# Altium PCB DC_Measure.PcbDoc
Units mil, origin at the board's own origin, x right, y up, seen from the top; angles counter-clockwise.
Board outline 4448.82 x 2165.35 mil, 2 copper layers (Top Layer, Bottom Layer); 54 components, 44 nets, 356 pads, 396 vias.
Unrouted connection lines stored in the file: 3.
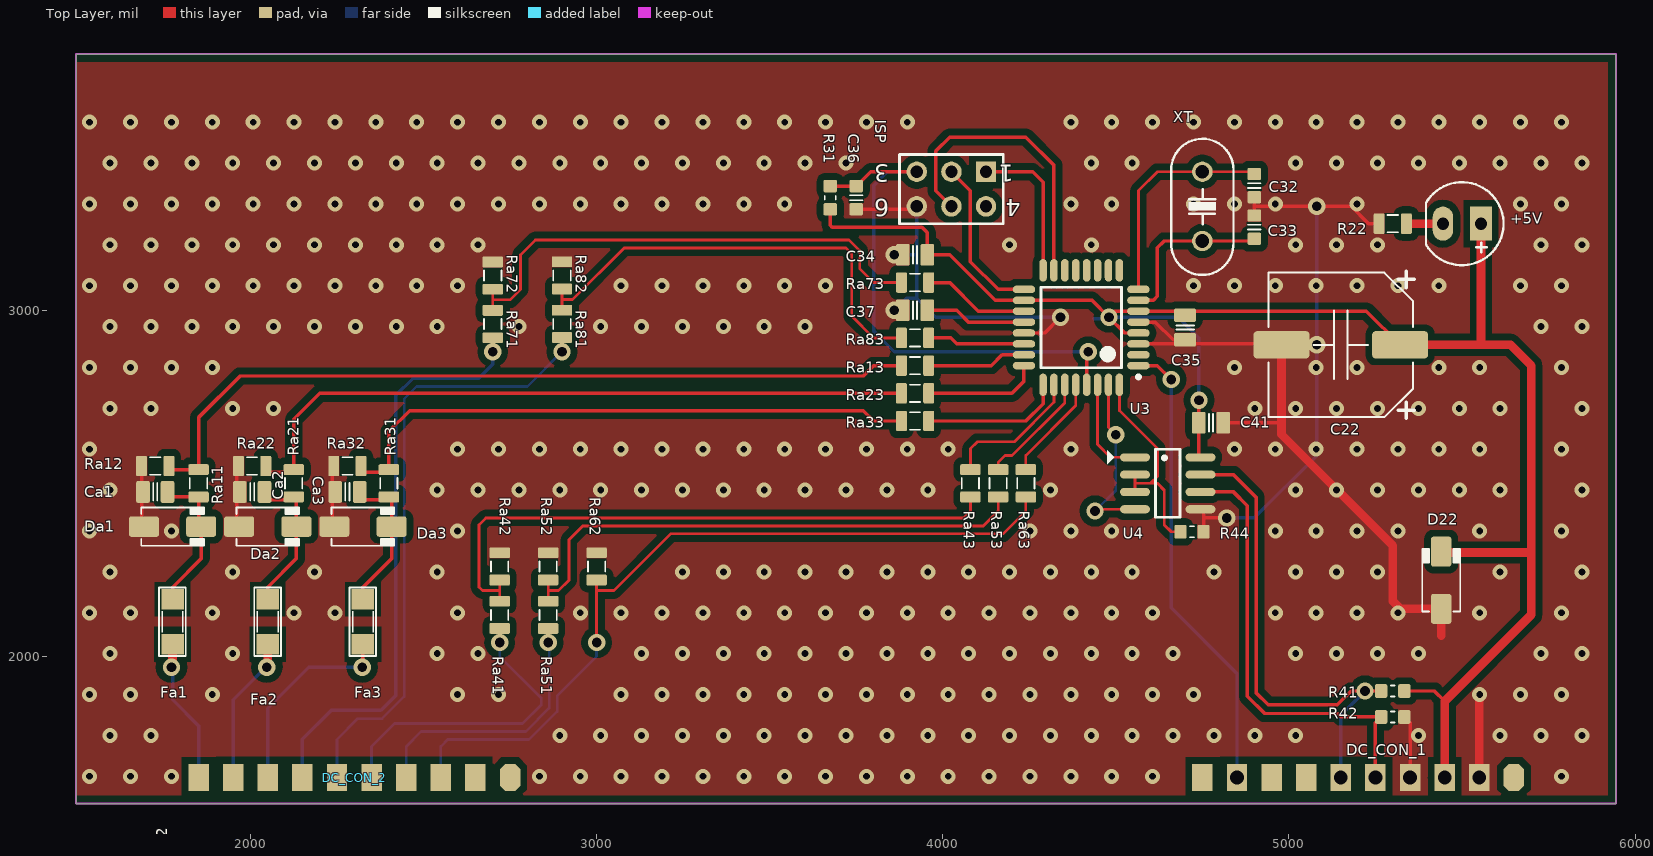
[diagram p0: Top Layer view]
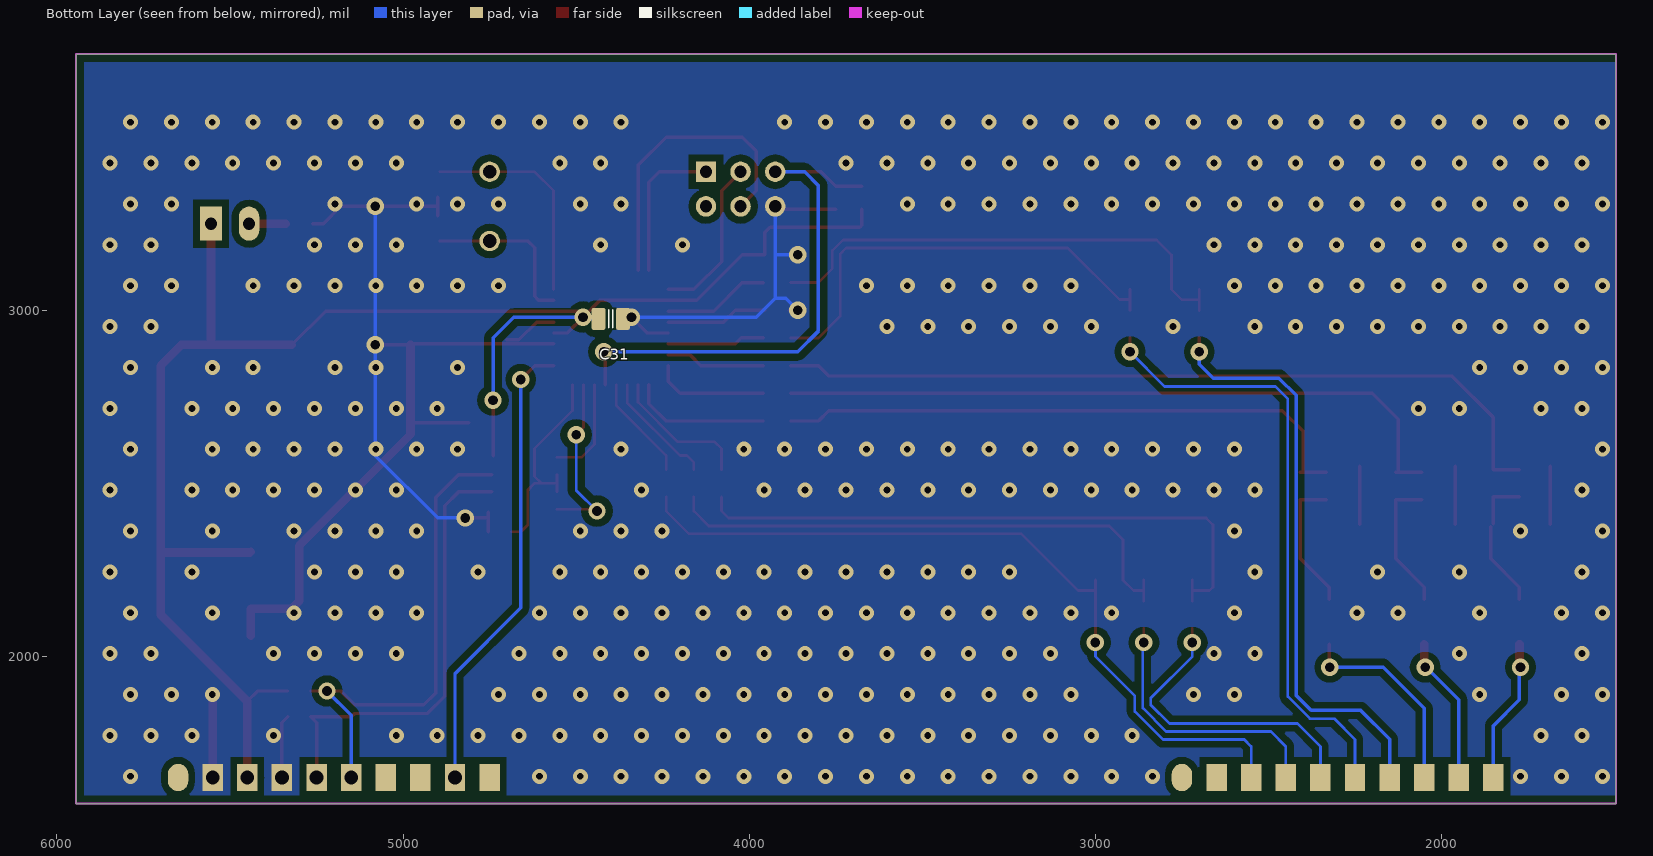
[diagram p1: Bottom Layer view, seen from below]
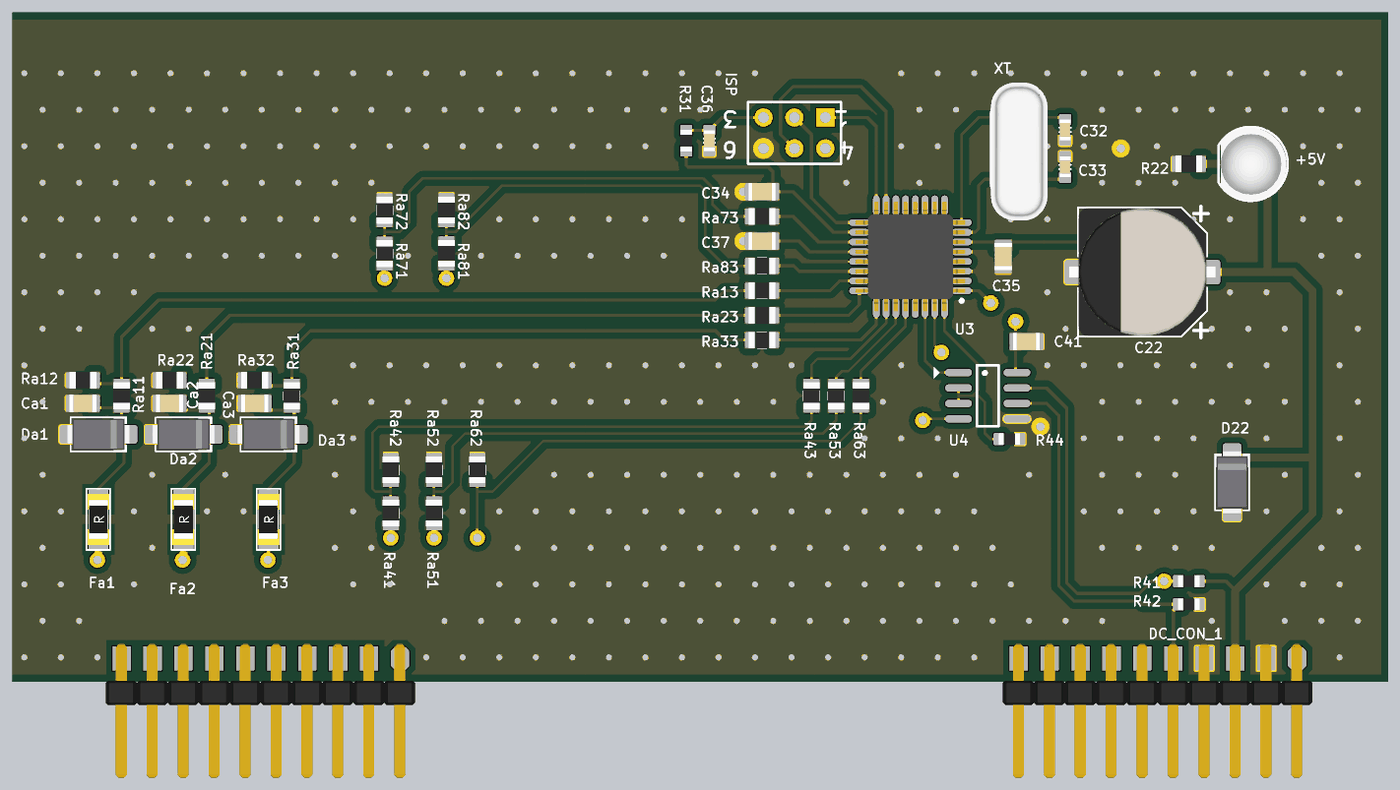
[diagram p2: 3D render of the assembled board from above, using the file's embedded part models]

## Layer stack, top to bottom
Top Solder: solder mask 0.4, Solder Resist, Dk 3.5
Top Layer: signal copper 1.4
Dielectric 1: dielectric 12.6, FR-4, Dk 4.8
Bottom Layer: signal copper 1.4
Bottom Solder: solder mask 0.4, Solder Resist, Dk 3.5

## Board outline
1496.06,1574.8 5944.88,1574.8 5944.88,3740.16 1496.06,3740.16

## Design rules (kind name [scope] priority, off if disabled: settings)
Clearance [All] p1: gap=10 except(8: Arc-SMDPad Track-SMDPad SMDPad-SMDPad; 20: Arc-Poly Track-Poly SMDPad-Poly THPad-Poly Via-Poly Fill-Poly Poly-Poly)
PlaneConnect [All] p1: planeconnectstyle=Direct reliefexpansion=20 reliefentries=4 reliefconductorwidth=10 reliefairgap=10
PolygonConnect [All] p1: connectstyle=Direct reliefconductorwidth=10 reliefentries=4 polygonreliefangle="90 Angle" airgapwidth=10
RoutingVias [All] p1: holewidth=28 width=50 viastyle="Through Hole" minholewidth=28 minwidth=50 maxholewidth=196.85 maxwidth=196.85
SolderMaskExpansion [All] p1: expansion=4
Width [All] p1: maxlimit=50 minlimit=8 preferedwidth=25
29 further rules are at their usual default settings.

## Components (designator, comment, footprint, x,y, rotation, side; value= is the part's Value field where it differs from the comment)
+5V "Led" "LED 5mm RED" 5500,3250 r180 top
C22 "2200uF/35V" CAP_ELEC_SIZE_G 5150,2900 r90 top
C31 "Cap" CAPC2012N_F#1 4400,2975 r180 bottom
C32 "CAP NP" CAPC1608N 4900,3360 r270 top
C33 "CAP NP" CAPC1608N 4900,3240 r90 top
C34 "Cap" CAPC2012N_F#2 3920,3160 r180 top
C35 "Cap" CAPC2012N_F#2 4700,2950 r270 top
C36 "CAP NP" CAPC1608N 3750,3325 r90 top
C37 "Cap" CAPC2012N_F#2 3920,3000 r180 top
C41 "100nF/104" CAPC2012N_F#2 4775,2675 r180 top
Ca1 "CAP NP" CAPC2012N_F#2 1725,2475 r0 top
Ca2 "CAP NP" CAPC2012N_F#2 2005,2475 r0 top
Ca3 "CAP NP" CAPC2012N_F#2 2280,2475 r0 top
D22 "Diode" DO-214AC 5440,2220 r90 top
Da1 "Diode" DO-214AC 1775,2375 r0 top
Da2 "Diode" DO-214AC 2050,2375 r0 top
Da3 "Diode" DO-214AC 2325,2375 r0 top
DC_CON_1 "Header 10X2A" OMC10 5650,1650 r180 top
DC_CON_2 "Header 10X2A" OMC10 2750,1650 r180 top
Fa1 "1.5A" "SMD 1206" 1775,2100 r90 top
Fa2 "1.5A" "SMD 1206" 2050,2100 r90 top
Fa3 "1.5A" "SMD 1206" 2325,2100 r90 top
ISP "Header 3X2A" HDR2X3_CEN 4125,3400 r180 top
R22 "Res_0805_1k" RESC2012N_F 5300,3250 r180 top
R31 "Res" RESC1608N_ZERO 3675,3325 r270 top
R41 "1k" RESC1608N_ZERO 5300,1900 r0 top
R42 "1k" RESC1608N_ZERO 5300,1825 r180 top
R44 "330R" RESC1608N_ZERO 4720,2360 r180 top
Ra11 "Res" RESC2012N_F 1850,2500 r90 top
Ra12 "Res" RESC2012N_F 1725,2550 r0 top
Ra13 "Res" RESC2012N_F 3920,2840 r180 top
Ra21 "Res" RESC2012N_F 2125,2500 r270 top
Ra22 "Res" RESC2012N_F 2005,2550 r180 top
Ra23 "Res" RESC2012N_F 3920,2760 r0 top
Ra31 "Res" RESC2012N_F 2400,2500 r90 top
Ra32 "Res" RESC2012N_F 2280,2550 r0 top
Ra33 "Res" RESC2012N_F 3920,2680 r180 top
Ra41 "Res" RESC2012N_F 2720,2120 r90 top
Ra42 "Res" RESC2012N_F 2720,2260 r270 top
Ra43 "Res" RESC2012N_F 4080,2500 r270 top
Ra51 "Res" RESC2012N_F 2860,2120 r270 top
Ra52 "Res" RESC2012N_F 2860,2260 r90 top
Ra53 "Res" RESC2012N_F 4160,2500 r90 top
Ra62 "Res" RESC2012N_F 3000,2260 r270 top
Ra63 "Res" RESC2012N_F 4240,2500 r270 top
Ra71 "Res" RESC2012N_F 2700,2960 r270 top
Ra72 "Res" RESC2012N_F 2700,3100 r90 top
Ra73 "Res" RESC2012N_F 3920,3080 r0 top
Ra81 "Res" RESC2012N_F 2900,2960.63 r270 top
Ra82 "Res" RESC2012N_F 2900,3100.63 r90 top
Ra83 "Res" RESC2012N_F 3920,2920 r0 top
U3 "ATmega88PA" 32PIN 4400,2950 r180 top
U4 "MAX485" SO-8 4650,2500 r0 top
XT "20MHz" XT2 4750,3300 r90 top

## Footprints (in the part's own frame and the unit in brackets; to place one, negate y for a bottom-side part, rotate by r counter-clockwise, add the part's x,y. Pads: shape width x height; smd on the part's side, far side on the other; paste and mask are expansions set on the pad)
32PIN [mm]
  oval 1.65x0.55 smd: 1(-4.2,2.8) 2(-4.2,2) 3(-4.2,1.2) 4(-4.2,0.4) 5(-4.2,-0.4) 6(-4.2,-1.2) 7(-4.2,-2) 8(-4.2,-2.8) 17(4.2,-2.8) 18(4.2,-2) 19(4.2,-1.2) 20(4.2,-0.4) 21(4.2,0.4) 22(4.2,1.2) 23(4.2,2) 24(4.2,2.8)
  oval 0.55x1.65 smd: 9(-2.8,-4.2) 10(-2,-4.2) 11(-1.2,-4.2) 12(-0.4,-4.2) 13(0.4,-4.2) 14(1.2,-4.2) 15(2,-4.2) 16(2.8,-4.2) 25(2.8,4.2) 26(2,4.2) 27(1.2,4.2) 28(0.4,4.2) 29(-0.4,4.2) 30(-1.2,4.2) 31(-2,4.2) 32(-2.8,4.2)
  silkscreen extent -4.33,-2.95 2.95,3.75, body extent -4.5,-4.5 4.5,4.5, height 1.6
CAP_ELEC_SIZE_G [mm] "Capacitor, polarized, aluminum can; 10.0x10.2mm DxH"
  round 0.635 on Mech14: 0(0,0)
  rrect25% 2x4.1 smd: 1(0,-4.35) 2(0,4.35)
  silkscreen extent -5.4,-5.4 5.4,5.3, body extent -5.25,-6 5.25,6, height 10.5
CAPC1608N [mm] "Chip Capacitor, Body 1.6x0.8mm, 0603, IPC Medium Density"
  round 0.254 on Mech14: 0(0,0)
  rrect25% 0.9x1 smd: 1(-0.85,0) 2(0.85,0)
  Top Layer pour cut-out: -0.4,0.6 0.4,0.6 0.4,-0.6 -0.4,-0.6
  silkscreen extent -0.18,-0.48 0.18,0.48, body extent -0.85,-0.45 0.85,0.45, height 0.89
CAPC2012N_F#1 [mm] "Chip Capacitor, Body 2.0x1.2mm, 0805, IPC Medium Density, for Flex circuits"
  round 0.254 on Mech14: 0(0,0)
  rrect25% 1.2x1.4 on Bottom Solder: 1(-0.9,0) 1(0.9,0)
  rrect25% 1x1.6 smd paste-1: 1(-0.9,0) 2(0.9,0)
  rrect25% 1x1.4 on Bottom Paste: 1(-0.9,0) 1(0.9,0)
  Top Layer pour cut-out: -0.4,0.8 0.4,0.8 0.4,-0.8 -0.4,-0.8
  silkscreen extent -0.15,-0.65 0.15,0.65, body extent -1.1,-0.72 1.1,0.73, height 1.34
CAPC2012N_F#2 [mm] "Chip Capacitor, Body 2.0x1.2mm, 0805, IPC Medium Density, for Flex circuits"
  round 0.254 on Mech14: 0(0,0)
  rrect25% 1.2x1.4 on Top Solder: 1(-0.9,0) 1(0.9,0)
  rrect25% 1x1.6 smd paste-1: 1(-0.9,0) 2(0.9,0)
  rrect25% 1x1.4 on Top Paste: 1(-0.9,0) 1(0.9,0)
  Top Layer pour cut-out: -0.4,0.8 0.4,0.8 0.4,-0.8 -0.4,-0.8
  silkscreen extent -0.15,-0.65 0.15,0.65, body extent -1.1,-0.72 1.1,0.73, height 1.34
DO-214AC [mm] "JEDEC DO214 variation AC. SMA"
  round 0.508 on Mech14: 0(0,0)
  rrect25% 2.2x1.5 smd: A(-2.1,0) K(2.1,0)
  silkscreen extent -2.3,-1.4 2.3,1.4, body extent -2.6,-1.3 2.6,1.3, height 2.42
HDR2X3_CEN [mm] "Connector; Header; 3x2 Position"
  rect 1.5x1.5 hole 0.9: 1(0,0)
  round 1.5 hole 0.9: 2(2.54,0) 3(5.08,0) 4(0,2.54) 5(2.54,2.54) 6(5.08,2.54)
  silkscreen extent -1.27,-1.27 6.35,3.81
"LED 5mm RED" [mm]
  rect 1.6x2.5 hole 0.9: A(-1.397,0)
  oval 1.5x2.5 hole 0.9: K(1.397,0)
  silkscreen extent -3.04,-3.05 2.64,3.04, body extent -2.94,-2.97 2.48,3.05, height 12.31
OMC10 [mm]
  oct 1.5x2 smd: 1(0,0)
  rect 1.5x2 smd: 2(2.54,0) 3(5.08,0) 4(7.62,0) 5(10.16,0) 6(12.7,0) 7(15.24,0) 8(17.78,0) 9(20.32,0) 10(22.86,0)
  oval 1.5x2 smd far side: 11(0,0)
  rect 1.5x2 smd far side: 12(2.54,0) 13(5.08,0) 14(7.62,0) 15(10.16,0) 16(12.7,0) 17(15.24,0) 18(17.78,0) 19(20.32,0) 20(22.86,0)
  body extent -1.24,-1.18 24.16,9.82, height 2.33
RESC1608N_ZERO [mm] "Chip Resistor, Body 1.6x0.8mm, 0603, IPC Medium Density"
  round 0.254 on Mech14: 0(0,0)
  rrect25% 0.9x1 smd: 1(-0.85,0) 2(0.85,0)
  Top Layer pour cut-out: -0.4,0.6 0.4,0.6 0.4,-0.6 -0.4,-0.6
  silkscreen extent -0.15,-0.41 0.15,0.41, body extent -0.87,-0.47 0.88,0.48, height 0.54
RESC2012N_F [mm] "Chip Resistor, Body 2.0x1.2mm, 0805, IPC Medium Density"
  round 0.254 on Mech14: 0(0,0)
  rrect25% 1x1.3 on Top Solder: 1(-1,0) 1(1,0)
  rrect25% 0.8x1.5 smd paste-1: 1(-1,0) 2(1,0)
  rrect25% 0.8x1.3 on Top Paste: 1(-1,0) 1(1,0)
  Top Layer pour cut-out: -0.6,0.75 0.6,0.75 0.6,-0.75 -0.6,-0.75
  silkscreen extent -0.38,-0.64 0.38,0.64, body extent -1.1,-0.67 1.1,0.68, height 0.69
"SMD 1206" [mil]
  rect 60x65 smd: 1(-65,0) 2(65,0)
  silkscreen extent -99,-38 99,39, body extent -83,-35 83,36, height 25
SO-8 [mm] "8-Pin Small Outline Integrated Circuit 1.27 mm Pitch, IPC Medium Density"
  oval 2.2x0.6 smd: 1(-2.4,1.905) 2(-2.4,0.635) 3(-2.4,-0.635) 4(-2.4,-1.905) 5(2.4,-1.905) 6(2.4,-0.635) 7(2.4,0.635) 8(2.4,1.905)
  silkscreen extent -4.44,-2.5 0.9,2.5, body extent -1.95,-2.45 1.95,2.45, height 1.75
XT2 [mm]
  round 1.5 hole 1: 1(-2.54,0) 2(2.54,0)
  silkscreen extent -5.03,-2.29 4.96,2.29, body extent -5.93,-2.36 5.42,2.29, height 3.5

## Part data
C22: library part CP4, "Cap 1000uF/16V - 220uF/50V"
C41: library part "CAP NP"
DC_CON_1 DC_CON_2: "Header, 10-Pin, Dual row"
Fa1 Fa2 Fa3: library part Fuse
ISP: "Header, 3-Pin, Dual row"
R22: library part Res
R41 R42 R44: library part Res, "Tro dan"
U3: library part ATmega48/168/328, "ATmega48/168/328"
U4: "RS232 - RS485 (Same sn75176)"
XT: library part Crystal

## Via types
v1: diameter 43.31, hole 19.68, Top Layer to Bottom Layer, tented both sides, 369 vias
v2: diameter 50, hole 28, Top Layer to Bottom Layer, 21 vias
v3: diameter 59.06, hole 39.37, Top Layer to Bottom Layer, 6 vias

## Nets (pads, with @x,y where several pads share a name; then routed paths per layer and width w, separated by ;. In a path a pad name is that pad's centre, name@x,y a point inside that pad or via, vN(x,y) a via of type N, cw(c..) or ccw(c..) an arc to the next point about the centre after c; other vN are vias at no path point)
+3V3: DC_CON_1.7 DC_CON_1.17
+5V_IN: +5V.A C22.1 C31.1@4435.43,2975 C34.1@3955.43,3160 C35.1@4700,2985.43 C41.2 D22.K DC_CON_1.3 DC_CON_1.13 ISP.4 R31.2 R41.2 U3.4 U3.6 U3.18 U4.8 | length 5091.7
  Top Layer w10: R31.2 3675,3245 3680,3240 3940,3240 3955.43,3224.57 3955.43,3160 4020,3160 4151.26,3028.74 U3.18 4431.26,3028.74 v2(4480,2980) 4525.75,2934.25 U3.4 ; v2@4497.24,2997.24 U3.6 5224.02,2997.24 C22.1 ; U4.8@4739.57,2579.92 C41.2 4739.57,2739.57 v2(4740,2740) ; R41.2 5420,1900 5450,1870
  Top Layer w25: C22.1 5640,2900 5700,2840 5700,2300 ; D22.K 5442.68,2300 5700,2300 ; v3(5450,1650) 5450,1870 5700,2120 5700,2300 ; 5555,2905 +5V.A
  Bottom Layer w10: C31.1@4435.43,2975 4495,2975 v2@4500,2980 ; v2(4480,2980) v2@4500,2980 ; v2(4740,2740) 4740,2920 4680,2980 v2@4500,2980
+12V_IN: DC_CON_1.1 DC_CON_1.11
ADC0: Ra13.1@3959.37,2840 U3.23 | length 288.2
  Top Layer w10: Ra13.1@3959.37,2840 4140,2840 4171.26,2871.26 U3.23
ADC1: Ra23.2 U3.24 | length 334.7
  Top Layer w10: Ra23.2 4200,2760 4234.65,2794.65 U3.24
ADC2: Ra33.1@3959.37,2680 U3.25 | length 405.9
  Top Layer w10: Ra33.1@3959.37,2680 4240,2680 4289.76,2729.76 U3.25
ADC3: Ra43.1@4080,2539.37 U3.26 | length 407.8
  Top Layer w8: Ra43.1@4080,2539.37 4080,2600 4100,2620 4206.87,2620 4321.26,2734.39 U3.26
ADC4: Ra53.2 U3.27 | length 336.8
  Top Layer w8: Ra53.2 4160,2560 4180,2580 4200,2580 4352.76,2732.76 U3.27
ADC5: Ra63.1@4240,2539.37 U3.28 | length 305
  Top Layer w8: Ra63.1@4240,2539.37 4240,2580 4384.25,2724.25 U3.28
ADC6: Ra73.2 U3.19 | length 309.6
  Top Layer w10: Ra73.2 4020,3080 4102.76,2997.24 U3.19
ADC7: Ra83.2 U3.22 | length 282.4
  Top Layer w10: Ra83.2 4022.76,2920 4040,2902.76 U3.22
AREF: C37.1@3955.43,3000 U3.20 | length 293.4
  Top Layer w10: C37.1@3955.43,3000 4040,3000 4074.25,2965.75 U3.20
DC0: DC_CON_2.20 Fa1.1 | length 417.5
  Top Layer w25: v2(1771.65,1968.5) 1775,1971.85 Fa1.1
  Bottom Layer w10: v2@1775,1968.5 1775,1875 1850,1800 DC_CON_2.20
DC1: DC_CON_2.19 Fa2.1 | length 427.5
  Top Layer w25: v2(2047.24,1968.5) 2050,1971.26 Fa2.1
  Bottom Layer w10: DC_CON_2.19 1950,1875 v2@2045.37,1970.37
DC2: DC_CON_2.18 Fa3.1 | length 589.3
  Top Layer w10: v2(2322.83,1968.5) 2325,1970.67 Fa3.1
  Bottom Layer w10: DC_CON_2.18 2050,1850 2168.5,1968.5 v2(2322.83,1968.5)
DC3: DC_CON_2.17 Ra71.2 | length 1693.6
  Top Layer w10: v2(2700,2880) Ra71.2
  Bottom Layer w10: DC_CON_2.17 2150,1760 2234,1844 2377.13,1844 2420,1886.87 2420,2753.94 2470.06,2804 2660,2804 2700,2844 v2(2700,2880)
DC4: DC_CON_2.16 Ra81.2 | length 1769
  Top Layer w8: v2(2900,2880) Ra81.2
  Bottom Layer w8: DC_CON_2.16 2250,1760 2310,1820 2380,1820 2444,1884 2444,2744 2480,2780 2800,2780 v2(2900,2880)
DC5: DC_CON_2.15 Ra41.1@2720,2080.63 | length 900
  Top Layer w8: v2(2720,2040) Ra41.1@2720,2080.63
  Bottom Layer w8: DC_CON_2.15 2350,1740 2416,1806 2786,1806 2840,1860 2840,1880 2720,2000 v2(2720,2040)
DC6: DC_CON_2.14 Ra51.2 | length 780.2
  Top Layer w8: v2(2860,2040) Ra51.2
  Bottom Layer w8: DC_CON_2.14 2450,1740 2493,1783 2795.53,1783 2863,1850.47 2863,2037 v2(2860,2040)
GND: C22.2 C31.2 C32.2 C33.2 C34.2 C35.2 C36.1 C37.2 C41.1@4810.43,2675 Ca1.1@1689.57,2475 Ca2.1@1969.57,2475 Ca3.1@2244.57,2475 D22.A Da1.A Da2.A Da3.A DC_CON_1.2 DC_CON_1.4 DC_CON_1.12 DC_CON_1.14 ISP.6 R22.2 R42.1 R44.1 Ra12.1@1685.63,2550 Ra22.2 Ra32.1@2240.63,2550 Ra42.1@2720,2299.37 Ra52.2 Ra62.1@3000,2299.37 Ra72.2 Ra82.2 U3.3 U3.5 U3.21 U4.5 | length 5635.5
  Top Layer w10: Da1.A@1685.63,2381.69 Ra12.1@1685.63,2550 ; Da2.A@1960.63,2381.69 Ra22.2@1960.63,2550 ; Da3.A@2235.63,2381.69 Ra32.1@2235.63,2550 ; C36.1 ISP.6@3916.54,3291.54 ; v2(3860,3000) C37.2 ; U3.21 4294.25,2934.25 v2(4340,2980) ; U3.3 4975.98,2902.76 C22.2 v2(5080,2900) ; U3.5 4614.25,2965.75 4665.43,2914.57 C35.2 ; R44.1 4753.46,2400 ; U4.5@4753.46,2416.02 4753.46,2400 ; C41.1@4810.43,2675 4973.74,2675 ; v2(4820,2400) 4753.46,2400 ; C33.2 4900,3300 ; C32.2 4900,3300 ; R22.2 5230,3250 5180,3300 v2(5080,3300) 4900,3300 ; R42.1 5350,1808.46 v3(5350,1650)
  Top Layer w25: C22.2 4978.74,2641.26 5300,2320 5300,2160 5322.68,2137.32 D22.A 5440,2060 ; v3(5550,1650) v1@5550,1889.76
  Bottom Layer w10: v2(3860,3000) 3895,3035 3925,3035 ; v2(3860,3160) 3925,3160 ; ISP.6 3925,3160 ; v2(4340,2980) 3980,2980 3925,3035 ; v2(4820,2400) 4900,2400 5080,2580 v2(5080,2900) v2(5080,3300) ; 3925,3035 3925,3160
  other v1: 1535.43,1653.54 1653.54,1653.54 1771.65,1653.54 2834.64,1653.54 2952.76,1653.54 3070.87,1653.54 3188.98,1653.54 3307.09,1653.54 3425.2,1653.54 3543.31,1653.54 3661.42,1653.54 3779.53,1653.54 3897.64,1653.54 4015.75,1653.54 4133.86,1653.54 4251.97,1653.54 4370.08,1653.54 4488.19,1653.54 4606.3,1653.54 5787.4,1653.54 1594.49,1771.65 1712.6,1771.65 2893.7,1771.65 3011.81,1771.65 3129.92,1771.65 3248.03,1771.65 3366.14,1771.65 3484.25,1771.65 3602.36,1771.65 3720.47,1771.65 3838.58,1771.65 3956.69,1771.65 4074.8,1771.65 4192.91,1771.65 4311.02,1771.65 4429.13,1771.65 4547.24,1771.65 4665.35,1771.65 4783.46,1771.65 4901.57,1771.65 5019.68,1771.65 5374.01,1771.65 5610.23,1771.65 5728.34,1771.65 5846.45,1771.65 1535.43,1889.76 1653.54,1889.76 1889.76,1889.76 2598.42,1889.76 2716.53,1889.76 3070.87,1889.76 3188.98,1889.76 3307.09,1889.76 3425.2,1889.76 3543.31,1889.76 3661.42,1889.76 3779.53,1889.76 3897.64,1889.76 4015.75,1889.76 4133.86,1889.76 4251.97,1889.76 4370.08,1889.76 4488.19,1889.76 4606.3,1889.76 4724.41,1889.76 5551.18,1889.76 5669.29,1889.76 5787.4,1889.76 1594.49,2007.87 1948.82,2007.87 2539.37,2007.87 2657.48,2007.87 3129.92,2007.87 3248.03,2007.87 3366.14,2007.87 3484.25,2007.87 3602.36,2007.87 3720.47,2007.87 3838.58,2007.87 3956.69,2007.87 4074.8,2007.87 4192.91,2007.87 4311.02,2007.87 4429.13,2007.87 4547.24,2007.87 4665.35,2007.87 5019.68,2007.87 5137.79,2007.87 5255.9,2007.87 5374.01,2007.87 5728.34,2007.87 5846.45,2007.87 1535.43,2125.98 1653.54,2125.98 1889.76,2125.98 2125.98,2125.98 2244.09,2125.98 2598.42,2125.98 2952.76,2125.98 3070.87,2125.98 3188.98,2125.98 3307.09,2125.98 3425.2,2125.98 3543.31,2125.98 3661.42,2125.98 3779.53,2125.98 3897.64,2125.98 4015.75,2125.98 4133.86,2125.98 4251.97,2125.98 4370.08,2125.98 4488.19,2125.98 4606.3,2125.98 4960.63,2125.98 5078.74,2125.98 5196.85,2125.98 5314.96,2125.98 5551.18,2125.98 5787.4,2125.98 1594.49,2244.09 1948.82,2244.09 2185.04,2244.09 2539.37,2244.09 3248.03,2244.09 3366.14,2244.09 3484.25,2244.09 3602.36,2244.09 3720.47,2244.09 3838.58,2244.09 3956.69,2244.09 4074.8,2244.09 4192.91,2244.09 4311.02,2244.09 4429.13,2244.09 4547.24,2244.09 4783.46,2244.09 5019.68,2244.09 5137.79,2244.09 5255.9,2244.09 5610.23,2244.09 5846.45,2244.09 1535.43,2362.2 1771.65,2362.2 2598.42,2362.2 4251.97,2362.2 4370.08,2362.2 4488.19,2362.2 4960.63,2362.2 5078.74,2362.2 5196.85,2362.2 5314.96,2362.2 5551.18,2362.2 5787.4,2362.2 1594.49,2480.31 2539.37,2480.31 2657.48,2480.31 2775.59,2480.31 2893.7,2480.31 3011.81,2480.31 3129.92,2480.31 3248.03,2480.31 3366.14,2480.31 3484.25,2480.31 3602.36,2480.31 3720.47,2480.31 3838.58,2480.31 3956.69,2480.31 4311.02,2480.31 5019.68,2480.31 5137.79,2480.31 5255.9,2480.31 5374.01,2480.31 5492.12,2480.31 5610.23,2480.31 5846.45,2480.31 1535.43,2598.42 2598.42,2598.42 2716.53,2598.42 2834.64,2598.42 2952.76,2598.42 3070.87,2598.42 3188.98,2598.42 3307.09,2598.42 3425.2,2598.42 3543.31,2598.42 3661.42,2598.42 3779.53,2598.42 3897.64,2598.42 4015.75,2598.42 4370.08,2598.42 4842.52,2598.42 4960.63,2598.42 5078.74,2598.42 5196.85,2598.42 5314.96,2598.42 5433.07,2598.42 5551.18,2598.42 5787.4,2598.42 1594.49,2716.53 1712.6,2716.53 1948.82,2716.53 2066.93,2716.53 4901.57,2716.53 5019.68,2716.53 5137.79,2716.53 5255.9,2716.53 5374.01,2716.53 5492.12,2716.53 5610.23,2716.53 5846.45,2716.53 1535.43,2834.64 1653.54,2834.64 1771.65,2834.64 1889.76,2834.64 4842.52,2834.64 5078.74,2834.64 5196.85,2834.64 5433.07,2834.64 5551.18,2834.64 5787.4,2834.64 1594.49,2952.76 1712.6,2952.76 1830.71,2952.76 1948.82,2952.76 2066.93,2952.76 2185.04,2952.76 2303.15,2952.76 2421.26,2952.76 2539.37,2952.76 2775.59,2952.76 3011.81,2952.76 3129.92,2952.76 3248.03,2952.76 3366.14,2952.76 3484.25,2952.76 3602.36,2952.76 5728.34,2952.76 5846.45,2952.76 1535.43,3070.87 1653.54,3070.87 1771.65,3070.87 1889.76,3070.87 2007.87,3070.87 2125.98,3070.87 2244.09,3070.87 2362.2,3070.87 2480.31,3070.87 2598.42,3070.87 3070.87,3070.87 3188.98,3070.87 3307.09,3070.87 3425.2,3070.87 3543.31,3070.87 3661.42,3070.87 4724.41,3070.87 4842.52,3070.87 4960.63,3070.87 5078.74,3070.87 5196.85,3070.87 5314.96,3070.87 5433.07,3070.87 5669.29,3070.87 5787.4,3070.87 1594.49,3188.98 1712.6,3188.98 1830.71,3188.98 1948.82,3188.98 2066.93,3188.98 2185.04,3188.98 2303.15,3188.98 2421.26,3188.98 2539.37,3188.98 2657.48,3188.98 4192.91,3188.98 4429.13,3188.98 5019.68,3188.98 5137.79,3188.98 5255.9,3188.98 5728.34,3188.98 5846.45,3188.98 1535.43,3307.09 1653.54,3307.09 1771.65,3307.09 1889.76,3307.09 2007.87,3307.09 2125.98,3307.09 2244.09,3307.09 2362.2,3307.09 2480.31,3307.09 2598.42,3307.09 2716.53,3307.09 2834.64,3307.09 2952.76,3307.09 3070.87,3307.09 3188.98,3307.09 3307.09,3307.09 3425.2,3307.09 3543.31,3307.09 4370.08,3307.09 4488.19,3307.09 4724.41,3307.09 4842.52,3307.09 4960.63,3307.09 5196.85,3307.09 5669.29,3307.09 5787.4,3307.09 1594.49,3425.2 1712.6,3425.2 1830.71,3425.2 1948.82,3425.2 2066.93,3425.2 2185.04,3425.2 2303.15,3425.2 2421.26,3425.2 2539.37,3425.2 2657.48,3425.2 2775.59,3425.2 2893.7,3425.2 3011.81,3425.2 3129.92,3425.2 3248.03,3425.2 3366.14,3425.2 3484.25,3425.2 3602.36,3425.2 3720.47,3425.2 4429.13,3425.2 4547.24,3425.2 5019.68,3425.2 5137.79,3425.2 5255.9,3425.2 5374.01,3425.2 5492.12,3425.2 5610.23,3425.2 5728.34,3425.2 5846.45,3425.2 1535.43,3543.31 1653.54,3543.31 1771.65,3543.31 1889.76,3543.31 2007.87,3543.31 2125.98,3543.31 2244.09,3543.31 2362.2,3543.31 2480.31,3543.31 2598.42,3543.31 2716.53,3543.31 2834.64,3543.31 2952.76,3543.31 3070.87,3543.31 3188.98,3543.31 3307.09,3543.31 3425.2,3543.31 3543.31,3543.31 3661.42,3543.31 3779.53,3543.31 3897.64,3543.31 4370.08,3543.31 4488.19,3543.31 4606.3,3543.31 4724.41,3543.31 4842.52,3543.31 4960.63,3543.31 5078.74,3543.31 5196.85,3543.31 5314.96,3543.31 5433.07,3543.31 5551.18,3543.31 5669.29,3543.31 5787.4,3543.31
IDC: DC_CON_1.9 DC_CON_1.19 U3.1 | length 1339.8
  Top Layer w10: U3.1 4620.24,2839.76 v2(4660,2800)
  Bottom Layer w10: v2(4660,2800) 4660,2140 4850,1950 v3(4850,1650)
MCU_RX: U3.30 U4.1 | length 295.8
  Top Layer w8: U3.30 4447.24,2612.76 4485,2575 U4.1
MCU_TX: U3.31 U4.4 | length 515.9
  Top Layer w8: v2(4440,2420) 4445,2425 U4.4 ; U3.31 4478.74,2661.26 v2(4500,2640)
  Bottom Layer w8: v2(4440,2420) 4500,2480 v2(4500,2640)
MISO: ISP.1 U3.16 | length 432
  Top Layer w10: ISP.1 4260,3400 4289.76,3370.24 U3.16
MOSI: ISP.5 U3.15 | length 873.5
  Top Layer w10: ISP.5 3980,3345 3980,3460 4020,3500 4240,3500 4321.26,3418.74 U3.15
Net+5V_2: +5V.K R22.1@5339.37,3250 | length 105.6
  Top Layer w25: R22.1@5339.37,3250 +5V.K
NetCa1_2: Ca1.2 Da1.K Fa1.2 Ra11.1@1850,2460.63 | length 397.4
  Top Layer w10: Ca1.2@1774.8,2460.63 1850,2460.63 Da1.K@1850,2382.68 ; Fa1.2 1775,2200 1857.68,2282.68 Da1.K
NetCa2_2: Ca2.2 Da2.K Fa2.2 Ra21.2 | length 397.4
  Top Layer w10: Fa2.2 2050,2200 2132.68,2282.68 Da2.K 2132.68,2452.95 Ca2.2@2057.48,2452.95
NetCa3_2: Ca3.2 Da3.K Fa3.2 Ra31.1@2400,2460.63 | length 397.4
  Top Layer w10: Fa3.2 2325,2200 2407.68,2282.68 Da3.K 2407.68,2452.95 Ca3.2@2332.48,2452.95
NetRa11_2: Ra11.2 Ra12.2 Ra13.2 | length 2318.4
  Top Layer w10: Ra12.2@1775,2539.37 Ra11.2 1850,2690 1970,2810 3770,2810 3800,2840 Ra13.2
NetRa21_1: Ra21.1@2125,2539.37 Ra22.1@2044.37,2550 Ra23.1@3880.63,2760 | length 2007.3
  Top Layer w10: Ra22.1@2057.68,2531.69 Ra21.1@2132.68,2531.69 ; Ra21.1@2125,2539.37 2125,2685 2200,2760 Ra23.1@3880.63,2760
NetRa31_2: Ra31.2 Ra32.2 Ra33.2 | length 1703.5
  Top Layer w10: Ra32.2@2332.68,2531.69 Ra31.2@2407.68,2531.69 ; Ra31.2 2400,2650 2460,2710 3770,2710 3800,2680 Ra33.2
NetRa41_2: Ra41.2 Ra42.2 Ra43.2 | length 1782.6
  Top Layer w8: Ra41.2 2720,2190 ; Ra42.2 2720,2190 ; Ra43.2 4080,2420 4060,2400 2680,2400 2660,2380 2660,2200 2670,2190 2720,2190
NetRa51_1: Ra51.1@2860,2159.37 Ra52.1@2860,2220.63 Ra53.1@4160,2460.63 | length 1565.7
  Top Layer w8: Ra51.1@2860,2159.37 2860,2190 ; Ra52.1@2860,2220.63 2860,2190 ; Ra53.1@4160,2460.63 4160,2420 4117,2377 2960,2377 2920,2337 2920,2220 2890,2190 2860,2190
NetRa71_1: Ra71.1@2700,2999.37 Ra72.1@2700,3060.63 Ra73.1@3880.63,3080 | length 1453.8
  Top Layer w8: Ra71.1@2700,2999.37 2700,3030 ; Ra72.1@2700,3060.63 2700,3030 ; Ra73.1@3880.63,3080 3800,3080 3760,3120 3760,3172.53 3729.53,3203 2823,3203 2780,3160 2780,3060 2750,3030 2700,3030
NetRa81_1: Ra81.1@2900,3000 Ra82.1@2900,3061.26 Ra83.1@3880.63,2920 | length 1316.9
  Top Layer w8: Ra81.1@2900,3000 2900,3030.63 ; Ra82.1@2900,3061.26 2900,3030.63 ; Ra83.1@3880.63,2920 3800,2920 3737,2983 3737,3163 3720,3180 3080,3180 2930.63,3030.63 2900,3030.63
RS485A: DC_CON_1.5 DC_CON_1.15 R42.2 U4.6 | length 1295.5
  Top Layer w10: U4.6 4840,2475 4880,2435 4880,1884.64 4929.64,1835 5140,1835 5150,1825 R42.2 5250,1808.46 v3(5250,1650)
RS485B: DC_CON_1.6 DC_CON_1.16 R41.1 U4.7 | length 1424
  Top Layer w10: U4.7 4840,2525 4905,2460 4905,1895 4940,1860 5140,1860 5180,1900 v2(5220,1900) R41.1
  Bottom Layer w10: v3(5150,1650) 5150,1830 v2(5220,1900)
RS485D: R44.2 U3.32 U4.2 U4.3 | length 636
  Top Layer w8: U3.32 4510.24,2709.76 4620,2600 4620,2520 4600,2500 ; U4.3 4555.51,2500 ; U4.2 4555.51,2500 ; R44.2 4660,2360 4640,2380 4640,2480 4620,2500 4600,2500 ; 4555.51,2500 4600,2500
RST: C36.2 ISP.3 R31.1 U3.29 | length 1570.7
  Top Layer w10: R31.1 C36.2 3791.54,3400 ISP.3 ; U3.29 4415.75,2875.75 v2(4420,2880)
  Bottom Layer w10: ISP.3 3840,3400 3800,3360 3800,2940 3860,2880 v2(4420,2880)
SCK: ISP.2 U3.17 | length 470.5
  Top Layer w10: ISP.2 4080,3345 4080,3140 4159.76,3060.24 U3.17
TEMP-: DC_CON_2.13 Ra62.2 Ra63.2 | length 2270.6
  Top Layer w8: v2(3000,2040) 3000,2190 ; Ra62.2 3000,2190 ; Ra63.2 4240,2420 4174,2354 3214,2354 3050,2190 3000,2190
  Bottom Layer w8: DC_CON_2.13 2550,1740 2570,1760 2805.05,1760 2886,1840.95 2886,1886 3000,2000 v2(3000,2040)
XTAL1: C33.1 U3.7 XT.1 | length 481.1
  Top Layer w10: U3.7 4608.74,3028.74 4620,3040 4620,3180 4640,3200 XT.1 C33.1@4893.46,3200
XTAL2: C32.1 U3.8 XT.2 | length 635.9
  Top Layer w8: U3.8 4565.35,3345.35 4620,3400 XT.2 C32.1@4893.46,3400
pads on no net: C22.0 C31.0 C31.1@4364.57,2974.99 C31.1@4364.57,2975 C31.1@4435.43,2975 C31.1@4435.44,2974.99 C32.0 C33.0 C34.0 C34.1@3884.57,3160 C34.1@3884.57,3160.01 C34.1@3955.43,3160 C34.1@3955.44,3160.01 C35.0 C35.1@4699.99,2914.57 C35.1@4699.99,2985.44 C35.1@4700,2914.57 C35.1@4700,2985.43 C36.0 C37.0 C37.1@3884.57,3000 C37.1@3884.57,3000.01 C37.1@3955.43,3000 C37.1@3955.44,3000.01 C41.0 C41.1@4739.57,2675 C41.1@4739.57,2675.01 C41.1@4810.43,2675 C41.1@4810.44,2675.01 Ca1.0 Ca1.1@1689.56,2474.99 Ca1.1@1689.57,2475 Ca1.1@1760.43,2474.99 Ca1.1@1760.43,2475 Ca2.0 Ca2.1@1969.56,2474.99 Ca2.1@1969.57,2475 Ca2.1@2040.43,2474.99 Ca2.1@2040.43,2475 Ca3.0 Ca3.1@2244.56,2474.99 Ca3.1@2244.57,2475 Ca3.1@2315.43,2474.99 Ca3.1@2315.43,2475 D22.0 Da1.0 Da2.0 Da3.0 DC_CON_1.8 DC_CON_1.10 DC_CON_1.18 DC_CON_1.20 DC_CON_2.1 DC_CON_2.2 DC_CON_2.3 DC_CON_2.4 DC_CON_2.5 DC_CON_2.6 DC_CON_2.7 DC_CON_2.8 DC_CON_2.9 DC_CON_2.10 DC_CON_2.11 DC_CON_2.12 R22.0 R22.1@5260.63,3250 R22.1@5260.63,3250.01 R22.1@5339.37,3250 R22.1@5339.37,3250.01 R31.0 R41.0 R42.0 R44.0 Ra11.0 Ra11.1@1850,2460.63 Ra11.1@1850,2539.37 Ra11.1@1850.01,2460.63 Ra11.1@1850.01,2539.37 Ra12.0 Ra12.1@1685.63,2549.99 Ra12.1@1685.63,2550 Ra12.1@1764.37,2549.99 Ra12.1@1764.37,2550 Ra13.0 Ra13.1@3880.63,2840 Ra13.1@3880.63,2840.01 Ra13.1@3959.37,2840 Ra13.1@3959.37,2840.01 Ra21.0 Ra21.1@2124.99,2460.63 Ra21.1@2124.99,2539.37 Ra21.1@2125,2460.63 Ra21.1@2125,2539.37 Ra22.0 Ra22.1@1965.63,2550 Ra22.1@1965.63,2550.01 Ra22.1@2044.37,2550 Ra22.1@2044.37,2550.01 Ra23.0 Ra23.1@3880.63,2759.99 Ra23.1@3880.63,2760 Ra23.1@3959.37,2759.99 Ra23.1@3959.37,2760 Ra31.0 Ra31.1@2400,2460.63 Ra31.1@2400,2539.37 Ra31.1@2400.01,2460.63 Ra31.1@2400.01,2539.37 Ra32.0 Ra32.1@2240.63,2549.99 Ra32.1@2240.63,2550 Ra32.1@2319.37,2549.99 Ra32.1@2319.37,2550 Ra33.0 Ra33.1@3880.63,2680 Ra33.1@3880.63,2680.01 Ra33.1@3959.37,2680 Ra33.1@3959.37,2680.01 Ra41.0 Ra41.1@2720,2080.63 Ra41.1@2720,2159.37 Ra41.1@2720.01,2080.63 Ra41.1@2720.01,2159.37 Ra42.0 Ra42.1@2719.99,2220.63 Ra42.1@2719.99,2299.37 Ra42.1@2720,2220.63 Ra42.1@2720,2299.37 Ra43.0 Ra43.1@4079.99,2460.63 Ra43.1@4079.99,2539.37 Ra43.1@4080,2460.63 Ra43.1@4080,2539.37 Ra51.0 Ra51.1@2859.99,2080.63 Ra51.1@2859.99,2159.37 Ra51.1@2860,2080.63 Ra51.1@2860,2159.37 Ra52.0 Ra52.1@2860,2220.63 Ra52.1@2860,2299.37 Ra52.1@2860.01,2220.63 Ra52.1@2860.01,2299.37 Ra53.0 Ra53.1@4160,2460.63 Ra53.1@4160,2539.37 Ra53.1@4160.01,2460.63 Ra53.1@4160.01,2539.37 Ra62.0 Ra62.1@2999.99,2220.63 Ra62.1@2999.99,2299.37 Ra62.1@3000,2220.63 Ra62.1@3000,2299.37 Ra63.0 Ra63.1@4239.99,2460.63 Ra63.1@4239.99,2539.37 Ra63.1@4240,2460.63 Ra63.1@4240,2539.37 Ra71.0 Ra71.1@2699.99,2920.63 Ra71.1@2699.99,2999.37 Ra71.1@2700,2920.63 Ra71.1@2700,2999.37 Ra72.0 Ra72.1@2700,3060.63 Ra72.1@2700,3139.37 Ra72.1@2700.01,3060.63 Ra72.1@2700.01,3139.37 Ra73.0 Ra73.1@3880.63,3079.99 Ra73.1@3880.63,3080 Ra73.1@3959.37,3079.99 Ra73.1@3959.37,3080 Ra81.0 Ra81.1@2899.99,2921.26 Ra81.1@2899.99,3000 Ra81.1@2900,2921.26 Ra81.1@2900,3000 Ra82.0 Ra82.1@2900,3061.26 Ra82.1@2900,3140 Ra82.1@2900.01,3061.26 Ra82.1@2900.01,3140 Ra83.0 Ra83.1@3880.63,2919.99 Ra83.1@3880.63,2920 Ra83.1@3959.37,2919.99 Ra83.1@3959.37,2920 U3.2 U3.9 U3.10 U3.11 U3.12 U3.13 U3.14

## Polygon pours and split planes (outlines as drawn)
GND on Top Layer "Top Layer-No Net" (solid, pour order 0): 1496.06,1574.8 5944.88,1574.8 5944.88,3740.16 1496.06,3740.16
GND on Bottom Layer "Top Layer-No Net" (solid, pour order 2): 1496.06,1574.8 5944.88,1574.8 5944.88,3740.16 1496.06,3740.16

## Keep-outs
Keep-Out Layer:
  the board outline again, w5.91

## Dimensions
1496.06,1220.47 to 5944.88,1259.84 on Top Overlay
1377.95,3740.16 to 1338.58,1574.8 on Top Overlay

## Text inside footprints (layer, text, board x,y; h text height)
ISP: Top Overlay "4" at 4225,3320 h50 r180; Top Overlay "1" at 4205,3420 h50 r180; Top Overlay "3" at 3845,3420 h50 r180; Top Overlay "6" at 3845,3320 h50 r180